# Altium PCB DRIVER.PcbDoc
Units mil, origin at the board's own origin, x right, y up, seen from the top; angles counter-clockwise.
Board outline 1737.03 x 1615.01 mil, 2 copper layers (Top Layer, Bottom Layer); 24 components, 14 nets, 82 pads, 0 vias.
Unrouted connection lines stored in the file: 1.
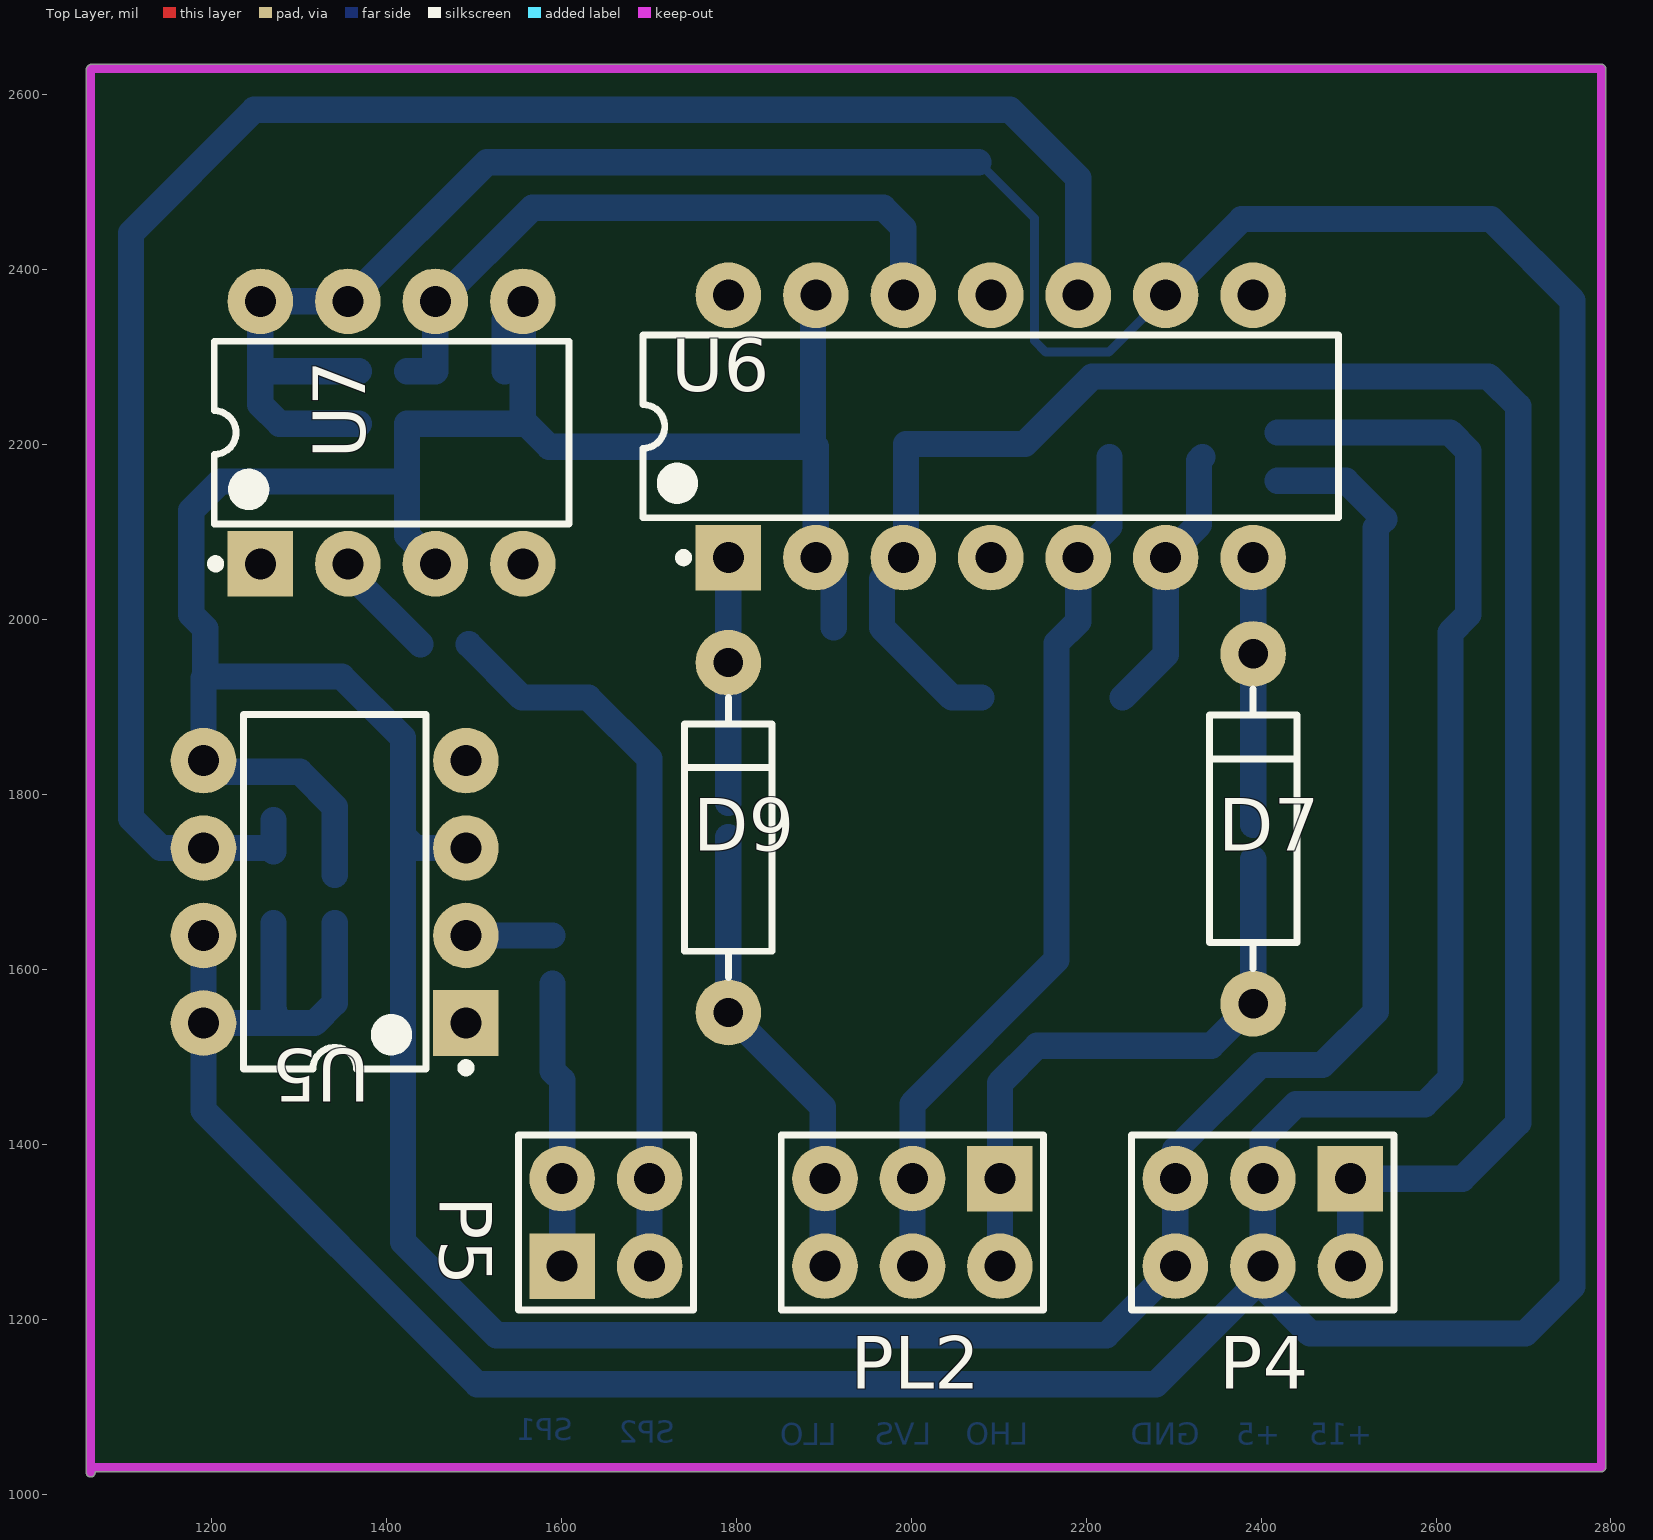
[diagram p0: Top Layer view]
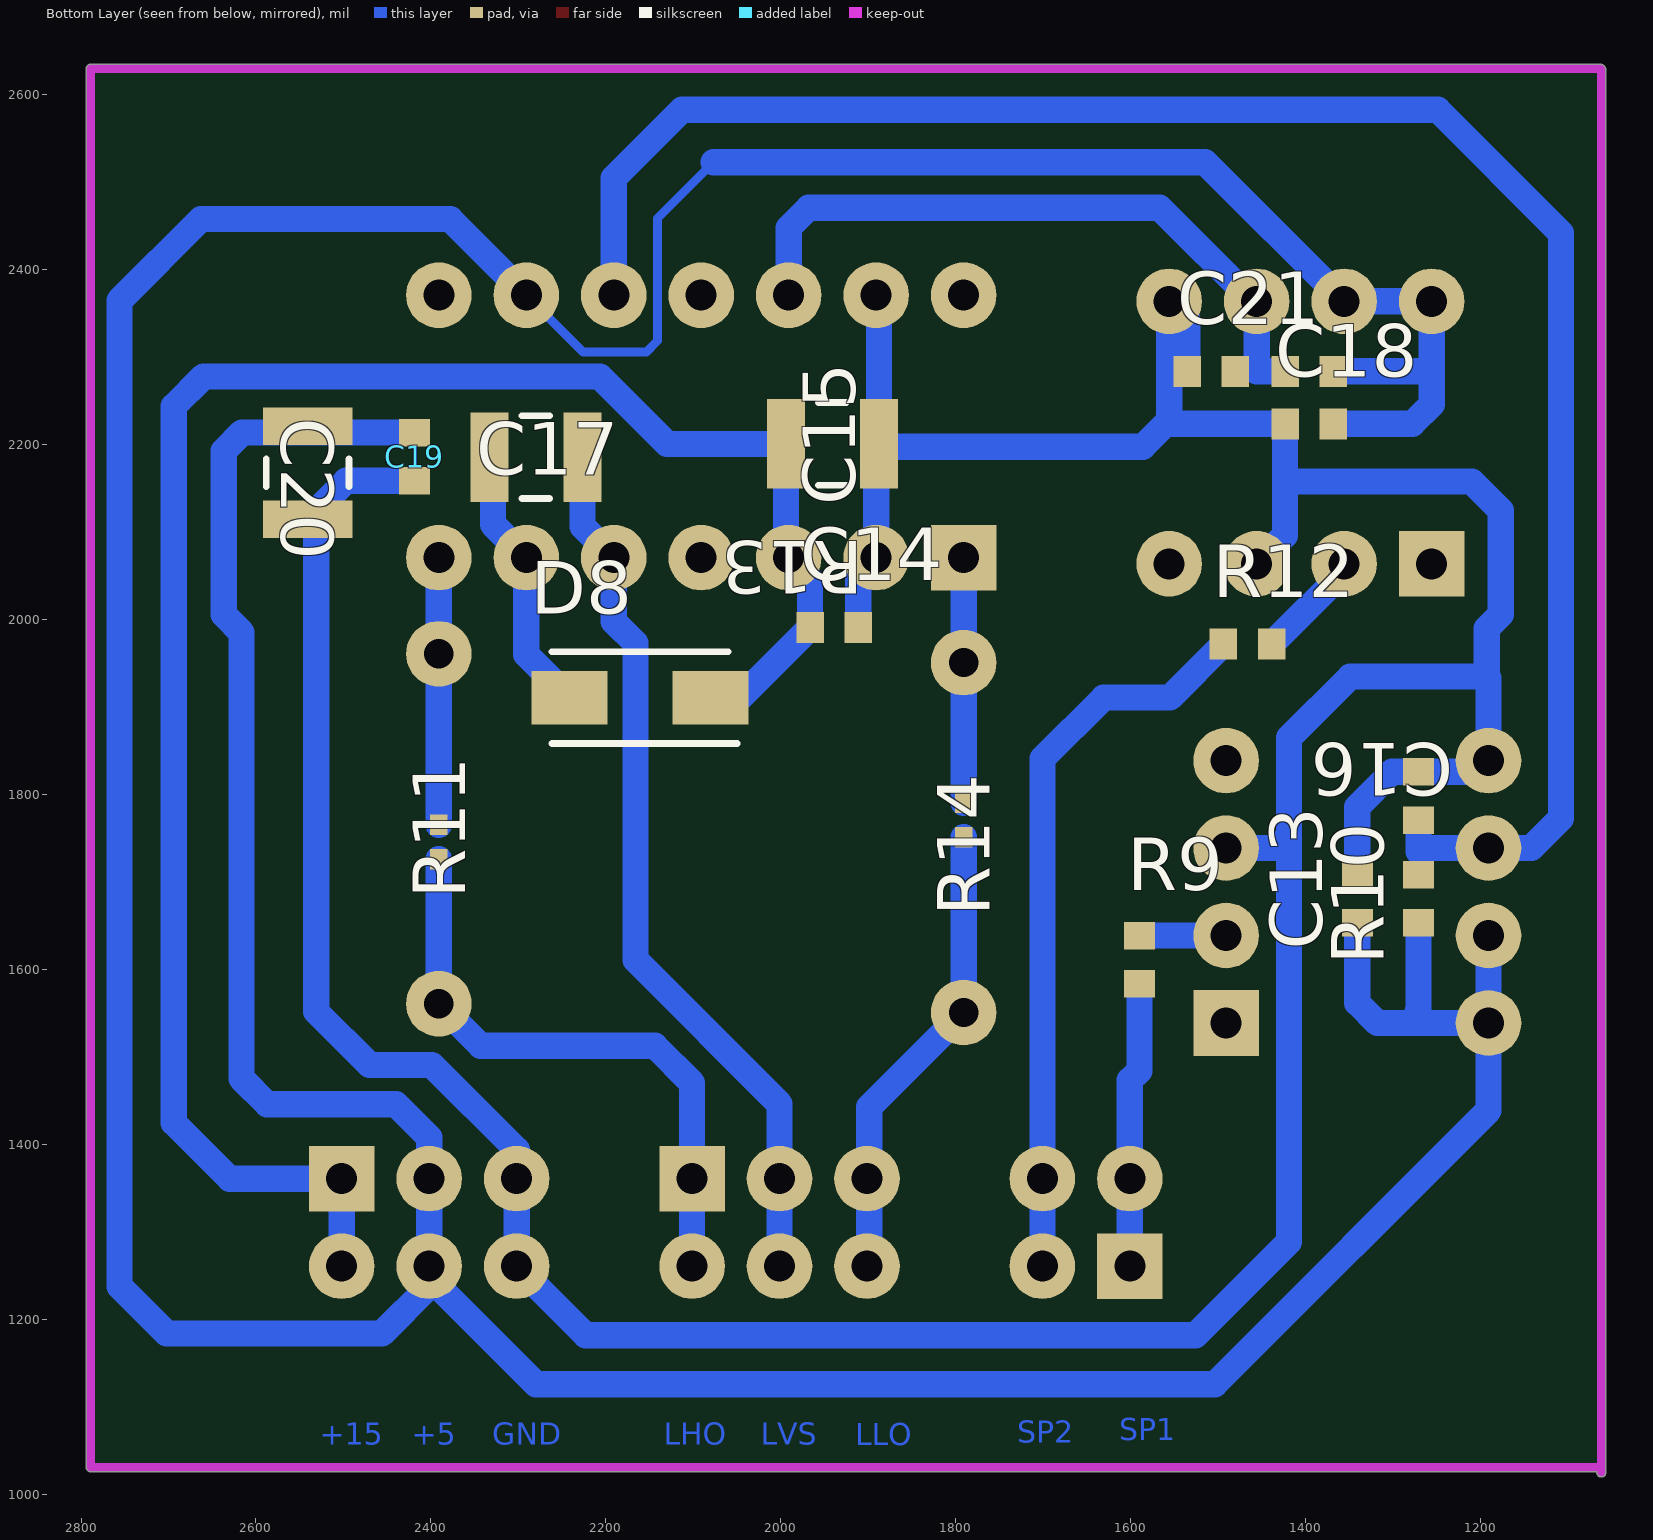
[diagram p1: Bottom Layer view, seen from below]

## Layer stack, top to bottom
Top Solder: solder mask 0.4, Solder Resist, Dk 3.5
Top Layer: signal copper 1.4
Dielectric 1: dielectric 12.6, FR-4, Dk 4.8
Bottom Layer: signal copper 1.4
Bottom Solder: solder mask 0.4, Solder Resist, Dk 3.5

## Board outline
2794.01,1031 cw(c2789,1031) 2789,1025.98 1067.02,1025.98 1067.02,1025 cw(c1062,1025) 1056.98,1025 1056.98,2629 cw(c1062,2629) 1058.99,2633.01 cw(c1063,2630) 1063,2635.01 2789,2635.01 cw(c2789,2630) 2794.01,2630

## Design rules (kind name [scope] priority, off if disabled: settings)
Clearance [All] p1: gap=5 ignorepadtopadclearanceinfootprint=FALSE except(0: Arc-Hole Track-Hole SMDPad-Hole THPad-Hole Via-Hole Fill-Hole Poly-Hole Region-Hole Text-Hole; 10: Arc-Text Track-Text SMDPad-Text THPad-Text Via-Text Fill-Text Poly-Text Region-Text Text-Text)
PolygonConnect [All] p1: connectstyle=Relief reliefconductorwidth=30 reliefentries=4 polygonreliefangle="90 Angle" airgapwidth=20
RoomDefinition DRIVER [InComponentClass('DRIVER')] p1: confinementstyle=ConfineIn formatcopy=TRUE lockcomponents=FALSE outline 1063,1031 2789,1031 2789,2630 1063,2630
RoutingVias [All] p1: holewidth=28 width=50 viastyle="Through Hole" minholewidth=28 minwidth=50 maxholewidth=28 maxwidth=50
SolderMaskExpansion [All] p1: expansion=4
Width [All] p1: maxlimit=30 minlimit=5 preferedwidth=30 bottomlayer_minwidth=10 bottomlayer_prefwidth=10 minimp=50.000000 maximp=50.000000 favimp=50.000000
30 further rules are at their usual default settings.

## Components (designator, comment, footprint, x,y, rotation, side; value= is the part's Value field where it differs from the comment)
C13 "Cap" 1608[0603] 1341,1681 r270 bottom value=0.1uF
C14 "Cap" 1608[0603] 1939.03,1991 r0 bottom value=0.1uF
C15 "Cap" C1210 1941,2201 r180 bottom value=33uF
C16 "Cap" 1608[0603] 1271,1798.56 r270 bottom value=1pF
C17 "Cap" C1210 2280,2186 r180 bottom value=2.2uF
C18 "Cap" 1608[0603] 1396,2224 r180 bottom value=0.1uF
C19 "Cap" 1608[0603] 2419,2186.44 r90 bottom value=0.1uF
C20 "Cap" C1210 2541,2168 r270 bottom value=10uF
C21 "Cap" 1608[0603] 1507.81,2284 r180 bottom value=1pF
D7 "1N5822" DIODE-0.4 2391,1761 r90 top
D8 "US1M" DIOM5127X229N 2161,1911 r0 bottom
D9 "1N5822" DIODE-0.4 1791,1751 r90 top
P4 "Header 3X2" HDR2X3 2502,1361 r180 top
P5 "Header 2X2" HDR2X2 1601,1261 r0 top
PL2 "Header 3X2A" HDR2X3_CEN 2101.47,1361 r180 top
R9 "Res2" 1608[0603] 1590,1611.44 r90 bottom value=470ohm
R10 "Res2" 1608[0603] 1271,1681 r270 bottom value=4.7k
R11 "Res2" 0402 2391,1746 r270 bottom value=6ohm
R12 "Res2" 1608[0603] 1466.56,1972 r180 bottom value=470ohm
R13 "Res2" 1608[0603] 1396,2284 r180 bottom value=4.7k
R14 "Res2" 0402 1791,1771 r270 bottom value=6ohm
U5 "6N137" DIP-8 1341,1689 r180 top
U6 "IR2110" DIP-14 2091,2221 r90 top
U7 "6N137" DIP-8 1406,2214 r90 top

## Footprints (in the part's own frame and the unit in brackets; to place one, negate y for a bottom-side part, rotate by r counter-clockwise, add the part's x,y. Pads: shape width x height; smd on the part's side, far side on the other; paste and mask are expansions set on the pad)
0402 [mm] "Chip Capacitor, Body 1.0x0.5mm, IPC High Density"
  rect 0.6x0.5 smd: 1(-0.5,0) 2(0.5,0)
  body extent -0.55,-0.3 0.55,0.3, height 1.3
1608[0603] [mm] "Chip Capacitor, Body 1.6x0.8mm, IPC High Density"
  rect 0.8x0.9 smd: 1(-0.7,0) 2(0.7,0)
  body extent -0.87,-0.48 0.87,0.48, height 1.3
C1210 [mm] "Chip Capacitor, Body 3.2x2.5mm, IPC High Density"
  rect 1.1x2.6 smd: 1(-1.35,0) 2(1.35,0)
  silkscreen extent -0.4,-1.2 0.4,1.2, body extent -1.7,-1.35 1.7,1.35, height 1.3
DIODE-0.4 [mm] "Diode, Thru-Hole; 2 Leads; 0.4 in Pin Spacing"
  round 1.905 hole 0.85: 1(-5.08,0) 2(5.08,0)
  silkscreen extent -4.06,-1.27 4.06,1.27
DIOM5127X229N [mm]
  rect 2.2x1.55 smd: 1(-2.05,0) 2(2.05,0)
  silkscreen extent -2.83,-1.33 2.55,1.33, body extent -2.55,-1.33 2.55,1.33, height 2.29
DIP-8 [mm] "DIP; 8 Leads; Row Spacing 7.62 mm; Pitch 2.54 mm"
  rect 1.905x1.905 hole 0.9: 1(-3.81,3.81)
  round 1.905 hole 0.9: 2(-3.81,1.27) 3(-3.81,-1.27) 4(-3.81,-3.81) 5(3.81,-3.81) 6(3.81,-1.27) 7(3.81,1.27) 8(3.81,3.81)
  silkscreen extent -3.94,-5.15 2.65,5.23, body extent -3.6,-5.15 3.6,5.15, height 5.08
DIP-14 [mm] "DIP; 14 Leads; Row Spacing 7.62 mm; Pitch 2.54 mm"
  rect 1.905x1.905 hole 0.9: 1(-3.81,7.62)
  round 1.905 hole 0.9: 2(-3.81,5.08) 3(-3.81,2.54) 4(-3.81,0) 5(-3.81,-2.54) 6(-3.81,-5.08) 7(-3.81,-7.62) 8(3.81,-7.62) 9(3.81,-5.08) 10(3.81,-2.54) 11(3.81,0) 12(3.81,2.54) 13(3.81,5.08) 14(3.81,7.62)
  silkscreen extent -3.93,-10.1 2.65,10.1, body extent -3.6,-10.1 3.6,10.1, height 5.08
HDR2X2 [mm] "Connector; Header; 2x2 Position"
  rect 1.905x1.905 hole 0.9: 1(0,0)
  round 1.905 hole 0.9: 2(0,2.54) 3(2.54,0) 4(2.54,2.54)
  silkscreen extent -1.27,-1.27 3.81,3.81
HDR2X3 [mm] "Connector; Header; 3x2 Position"
  rect 1.905x1.905 hole 0.9: 1(0,0)
  round 1.905 hole 0.9: 2(0,2.54) 3(2.54,0) 4(2.54,2.54) 5(5.08,0) 6(5.08,2.54)
  silkscreen extent -1.27,-1.27 6.35,3.81
HDR2X3_CEN [mm] "Connector; Header; 3x2 Position"
  rect 1.905x1.905 hole 0.9: 1(0,0)
  round 1.905 hole 0.9: 2(2.54,0) 3(5.08,0) 4(0,2.54) 5(2.54,2.54) 6(5.08,2.54)
  silkscreen extent -1.27,-1.27 6.35,3.81

## Part data
C13 C14 C15 C16 C17 C18 C19 C20 C21: "Capacitor", LatestRevisionDate=17-Jul-2002, LatestRevisionNote="Re-released for DXP Platform.", PackageDescription="Radial Cap, Thru-Hole; 2 Leads; 0.3 in Pin Spacing", PackageReference=RAD-0.3, Published=8-Jun-2000, Publisher="Altium Limited"
D7 D8 D9: library part 1N4148, "High Conductance Fast Diode", Code_JEDEC=DO-204-AH, ComponentLink1Description="Manufacturer Link", ComponentLink1URL=http://www.fairchildsemi.com/, ComponentLink2Description=Datasheet, ComponentLink2URL=http://www.fairchildsemi.com/ds/1N%2F1N4148.pdf, DatasheetDocument=1997, LatestRevisionDate=17-Jul-2002, LatestRevisionNote="Re-released for DXP Platform.", PackageReference=DO-35, Published=8-Jun-2000, Publisher="Altium Limited"
P4 PL2: "Header, 3-Pin, Dual row", LatestRevisionDate=17-Jul-2002, LatestRevisionNote="Re-released for DXP Platform.", Publisher="Altium Limited"
P5: "Header, 2-Pin, Dual row", LatestRevisionDate=17-Jul-2002, LatestRevisionNote="Re-released for DXP Platform.", Publisher="Altium Limited"
R9 R10 R11 R12 R13 R14: "Resistor", LatestRevisionDate=17-Jul-2002, LatestRevisionNote="Re-released for DXP Platform.", PackageDescription="Axial Device, Thru-Hole; 2 Leads; 0.4 in Pin Spacing", PackageReference=AXIAL-0.4, Published=8-Jun-2000, Publisher="Altium Limited"
U6: "High and Low Side Driver", ComponentLink1Description="Manufacturer Link", ComponentLink1URL=http://www.irf.com/, ComponentLink2Description=Datasheet, ComponentLink2URL=http://www.irf.com/product-info/datasheets/data/ir2110.pdf, DatasheetVersion=PD60147J, LatestRevisionDate=04-Mar-2005, LatestRevisionNote="Stylized 3D Model Added.", Note="Pins 4, 8 and 14 are not connected", PackageDescription="DIP; 14 Leads; Row Spacing 7.62 mm; Pitch 2.54 mm", PackageReference=PDIP14, Published=8-Jun-2000, Publisher="Altium Limited"

## Nets (pads, with @x,y where several pads share a name; then routed paths per layer and width w, separated by ;. In a path a pad name is that pad's centre, name@x,y a point inside that pad or via, vN(x,y) a via of type N, cw(c..) or ccw(c..) an arc to the next point about the centre after c; other vN are vias at no path point)
+15V: C14.2 C15.1 D8.1 P4.1 P4.2 U6.3 | length 2251.6
  Bottom Layer w30: D8.1 2046.59,1911 C14.2 1966.59,2046.59 U6.3 1994.15,2074.15 C15.1 2130,2201 2207,2278 2660,2278 2694,2244 2694,1425 2630,1361 P4.1 P4.2
GND: C13.1 C14.1 C15.2 C16.1 C18.1 C19.1 C20.2 C21.1 P4.5 P4.6 U5.3 U5.5 U6.2 U6.13 U7.3 U7.5 | length 5077.3
  Bottom Layer w30: C13.1 1341,1786 1300.88,1826.12 C16.1 1203.88,1826.12 U5.5 1191,1933 1193,1935 ; U7.3 1423.56,2096.44 1423.56,2158 ; U5.3 1433,1739 1419,1753 ; C21.1 1535.37,2343.37 U7.5 1556,2228 ; U6.13 1887.85,2367.85 C15.2 C15.2@1891,2197.85 ; C14.1 1911.47,2050.53 U6.2 C15.2@1891,2197.85 ; C19.1 2496.97,2158.88 C20.2 2531,2104.85 2531,1552 2470,1491 2399,1491 2302,1394 P4.5 P4.6 2223,1182 1526,1182 1419,1289 1419,1753 ; 1193,1935 1349,1935 1419,1865 1419,1753 ; 1193,1935 1193,1990 1177,2006 1177,2125 1210,2158 1423.56,2158 ; 1423.56,2158 C18.1 1552,2224 1556,2228 ; 1556,2228 1586.15,2197.85 C15.2@1891,2197.85
Ldw_Rup: C21.2 R13.1 U6.12 U7.6 | length 778.3
  Bottom Layer w30: R13.1 1456,2284 U7.6 1460,2364 1567,2471 1968,2471 1991,2448 U6.12
LHO: D7.1 PL2.1 PL2.4 R11.2 | length 701.8
  Bottom Layer w30: PL2.4 PL2.1 2101.47,1470.47 2144,1513 2343,1513 D7.1 R11.2
LLO: D9.1 PL2.3 PL2.6 R14.2 | length 536.1
  Bottom Layer w30: R14.2 D9.1 1899,1443 1899,1263.47 PL2.6
Lup_Rdw: C16.2 R10.1 U5.6 U6.10 | length 2191.5
  Bottom Layer w30: C16.2 1271,1735 1267,1739 U5.6 1142,1739 1108,1773 1108,2442 1249,2583 2113,2583 2191,2505 U6.10
LVS: C17.2 PL2.2 PL2.5 U6.5 | length 1018.4
  Bottom Layer w30: PL2.5 PL2.2 2001.47,1446.47 2166,1611 2166,1973 2191,1998 U6.5 2226.85,2106.85 C17.2
NetC22_1: C17.1 D8.2 U6.6 | length 312.9
  Bottom Layer w30: D8.2 2291,1960.29 U6.6 2329,2109 2329,2181.85 C17.1
NetD8_2: D7.2 R11.1 U6.7 | length 305.3
  Bottom Layer w30: R11.1 D7.2 U6.7
NetD10_2: D9.2 R14.1 U6.1 | length 280.3
  Bottom Layer w30: R14.1 D9.2 U6.1
NetR9_2: R9.2 U5.2 | length 99
  Bottom Layer w30: U5.2 R9.2
NetR12_2: R12.2 U7.2 | length 126.4
  Bottom Layer w30: U7.2 1356,2055 R12.2
SPWM1: P5.1 P5.2 R9.1 | length 327.4
  Bottom Layer w30: R9.1 1590,1484.47 1601,1473.47 P5.2 P5.1
VCC: C13.2 C18.2 C19.2 C20.1 P4.3 P4.4 P5.3 P5.4 R10.2 R12.1 R13.2 U5.7 U5.8 U6.9 U7.7 U7.8 | length 7872.6
  Bottom Layer w10: 2077,2523 2141,2459 2141,2319 2154,2306 2226,2306 U6.9
  Bottom Layer w30: U5.7 U5.8 ; R10.2 1271,1551 1272,1552 ; C13.2 1341,1562 1318,1539 U5.8 ; C18.2 1278,2224 1256,2246 1256,2292 ; R13.2 1264,2284 1256,2292 ; R12.1 1555.12,1911 1631,1911 1701,1841 P5.4 P5.3 ; 2077,2523 1515,2523 U7.7 U7.8 1256,2292 ; U6.9 2378,2458 2663,2458 2756,2365 2756,1238 2702,1184 2456,1184 2402,1238 P4.4@2402,1248 ; C19.2 2616,2214 2637,2193 2637,2006 2616.5,1985.5 2616.5,1475.5 2587,1446 2440,1446 2402,1408 P4.3 P4.4 P4.4@2402,1248 ; U5.8 1191,1439 1504,1126 2280,1126 P4.4@2402,1248
pads on no net: U5.1 U5.4 U6.4 U6.8 U6.11 U6.14 U7.1 U7.4

## Keep-outs
Keep-Out Layer:
  lines w10: 1062,1025 1062,1080 1062,2614 1062,2629 ; 1063,2630 2789,2630 2789,1031 1066,1031

## Other copper
Bottom Layer:
  text "SP1" at 1613,1062 h25
  text "SP2" at 1730,1059 h25
  text "LVS" at 2023,1057 h25
  text "LHO" at 2134,1057 h25
  text "GND" at 2330,1057 h25
  text "+5" at 2422,1057 h25
  text "+15" at 2527,1057 h25
  text "LLO" at 1915,1056 h25